# Altium PCB PCB2.pcbdoc (part 2 of 2)
Units mil, origin at the board's own origin, x right, y up, seen from the top; angles counter-clockwise.
Board outline 1968.5 x 1778.5 mil, 4 copper layers (Top Layer, Inner1, Inner2, Bottom Layer), stack 62.447 mil thick; 56 components, 57 nets, 242 pads, 74 vias.
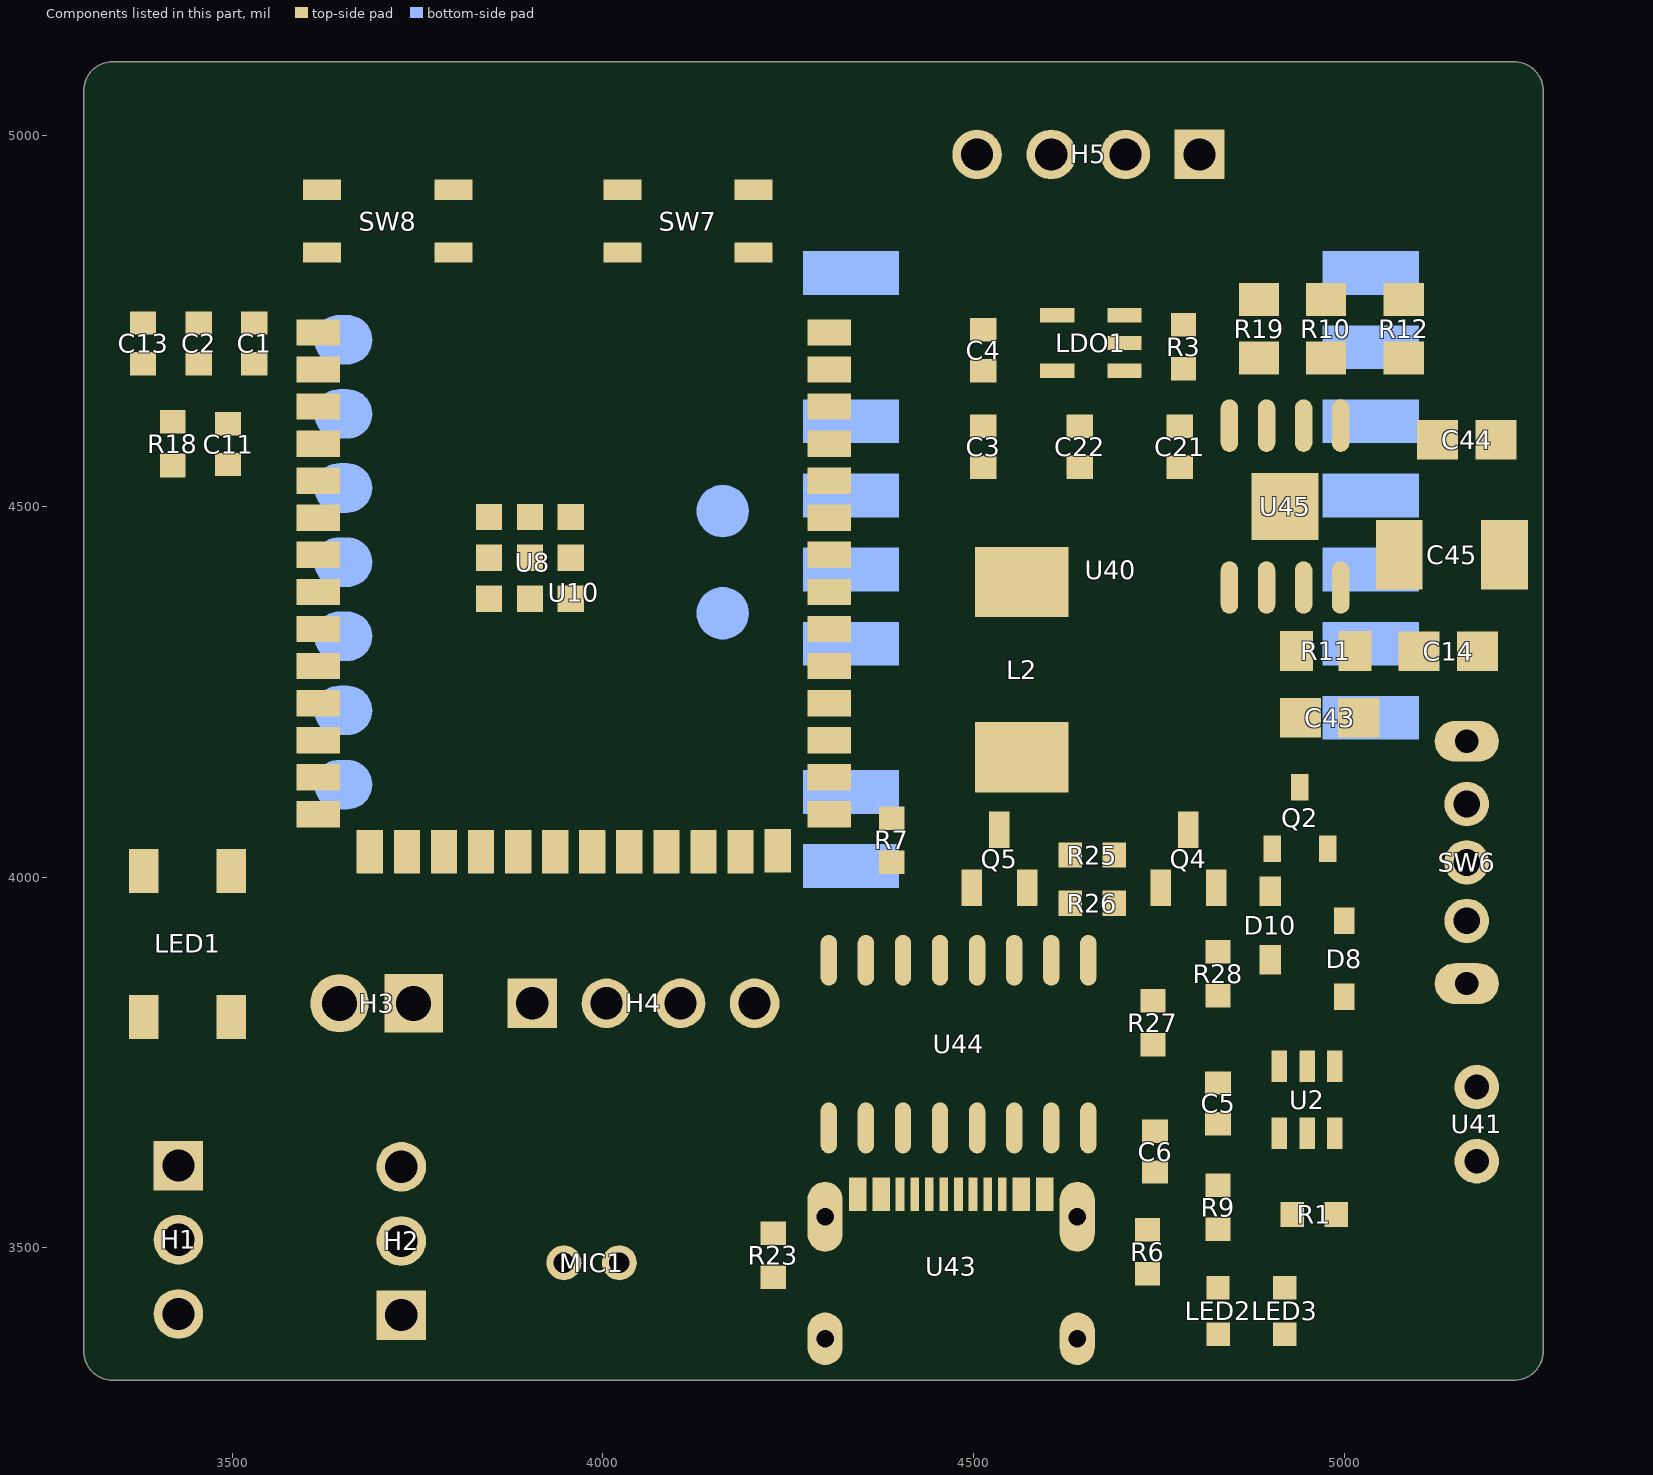
[diagram p4: the components of this part, seen from the top]

## Other copper (continued)
Bottom Layer:
  region net WS: 3552.49,4523.64 3548.25,4527.88 3548.67,4528.57 3548.8,4529.45 3548.71,4530.45 3548.48,4531.53 3547.89,4533.73 3547.68,4534.76 3547.62,4535.67 3560.28,4523.01 3559.37,4523.07 3558.34,4523.28 3556.14,4523.87 3555.06,4524.1 3554.06,4524.19 3553.19,4524.06
  region net $1N4036: 3641.61,3883.81 3647.61,3883.81 3647.84,3881.95 3648.47,3880.09 3649.48,3878.22 3650.8,3876.37 3652.4,3874.52 3654.21,3872.69 3658.31,3869.08 3667.06,3862.27 3670.93,3859.14 3673.96,3856.25 3615.27,3856.25 3618.29,3859.14 3622.16,3862.27 3630.91,3869.08 3635.01,3872.69 3636.83,3874.52 3638.42,3876.37 3639.75,3878.22 3640.75,3880.09 3641.39,3881.95
  region net SCK: 3682.24,3606.47 3682.24,3612.47 3683.8,3612.65 3685.36,3613.19 3686.94,3614.02 3688.51,3615.13 3690.09,3616.45 3691.66,3617.96 3694.74,3621.38 3700.58,3628.67 3703.24,3631.89 3705.67,3634.41 3705.67,3584.52 3703.24,3587.04 3700.58,3590.27 3694.74,3597.55 3691.66,3600.97 3690.09,3602.48 3688.51,3603.81 3686.94,3604.91 3685.36,3605.75 3683.8,3606.28
  region net DIN: 3694.61,4328 3694.61,4322 3693.58,4321.92 3692.54,4321.67 3691.53,4321.28 3690.58,4320.75 3689.73,4320.09 3689.02,4319.32 3688.47,4318.46 3688.13,4317.5 3688.13,4332.5 3688.47,4331.54 3689.02,4330.68 3689.73,4329.91 3690.58,4329.25 3691.53,4328.72 3692.54,4328.33 3693.58,4328.08
  region net BCLK: 3697.13,4228 3697.13,4222 3694.17,4221.84 3692.77,4221.6 3691.47,4221.21 3690.32,4220.63 3689.35,4219.84 3688.61,4218.81 3688.13,4217.5 3688.13,4232.5 3688.61,4231.19 3689.35,4230.16 3690.32,4229.37 3691.47,4228.79 3692.77,4228.4 3694.17,4228.16
  region net DIN: 3723.34,4375.52 3719.09,4371.27 3717.94,4372.24 3716.8,4372.84 3715.67,4373.15 3714.51,4373.23 3711.97,4373.08 3708.94,4373.01 3721.6,4385.67 3721.53,4382.65 3721.38,4380.11 3721.47,4378.94 3721.77,4377.81 3722.37,4376.68
  region net $1N4031: 3741.61,3878.37 3747.61,3878.37 ccw(c3758.86,3878.37) 3752.11,3869.37 3737.11,3869.37 ccw(c3730.36,3878.37)
  region net BCLK: 3758.34,4325.37 3754.09,4321.12 3752.94,4322.09 3751.8,4322.69 3750.67,4322.99 3749.51,4323.08 3746.97,4322.93 3743.94,4322.86 3756.6,4335.52 3756.53,4332.49 3756.38,4329.95 3756.47,4328.79 3756.77,4327.66 3757.37,4326.52
  region net WS: 3758.2,3543.93 3762.44,3539.69 3761.47,3538.46 3760.74,3536.97 3760.22,3535.27 3759.89,3533.37 3759.71,3531.32 3759.67,3529.14 3759.91,3524.55 3760.93,3515.27 3761.33,3511.1 3761.39,3507.61 3726.12,3542.88 3729.62,3542.82 3733.78,3542.42 3743.06,3541.39 3747.66,3541.16 3749.83,3541.2 3751.89,3541.37 3753.78,3541.71 3755.49,3542.23 3756.97,3542.96
  region net $1N4036: 4132.69,4460.93 4128.45,4465.17 4130.45,4467.38 4131.28,4468.55 4131.92,4469.74 4132.33,4470.96 4132.45,4472.2 4132.24,4473.45 4131.63,4474.71 4142.24,4464.11 4140.98,4464.71 4139.72,4464.93 4138.48,4464.8 4137.26,4464.39 4136.07,4463.75 4134.91,4462.92
  region net $1N4031: 4132.69,4323.13 4128.45,4327.37 4130.45,4329.59 4131.28,4330.75 4131.92,4331.94 4132.33,4333.16 4132.45,4334.4 4132.24,4335.66 4131.63,4336.92 4142.24,4326.31 4140.98,4326.92 4139.72,4327.13 4138.48,4327.01 4137.26,4326.6 4136.07,4325.96 4134.91,4325.13
  region net $1N5998: 3967.92,3504.95 3972.16,3500.71 3970.88,3499.3 3969.9,3497.98 3969.21,3496.74 3968.77,3495.54 3968.53,3494.37 3968.49,3493.22 3968.8,3490.89 3970.18,3485.65 3970.71,3482.45 3970.83,3480.65 3970.8,3478.69 3945.9,3503.59 3947.86,3503.62 3949.67,3503.5 3952.86,3502.97 3958.1,3501.59 3960.43,3501.27 3961.58,3501.32 3962.75,3501.55 3963.95,3502 3965.2,3502.69 3966.51,3503.66
  region net $1N5993: 4031.58,3511.21 4043.12,3514.26 4042.09,3513.1 4041.23,3511.86 4040.54,3510.55 4040,3509.18 4039.36,3506.29 4039.25,3503.26 4039.6,3500.16 4040.36,3497.07 4041.45,3494.04 4042.83,3491.16 4008.61,3499.45 4011.87,3501.42 4014.91,3502.82 4017.8,3503.86 4020.57,3504.76 4023.29,3505.73 4025.99,3506.98 4028.74,3508.74
  region net A3: 4854.09,4303.73 4858.34,4299.48 4857.37,4298.32 4856.77,4297.19 4856.47,4296.06 4856.38,4294.89 4856.53,4292.35 4856.6,4289.33 4843.94,4301.99 4846.97,4301.92 4849.51,4301.77 4850.67,4301.85 4851.8,4302.16 4852.94,4302.76
  region net A4: 4876.02,4203 4876.02,4197 4874.52,4196.87 4873.29,4196.49 4872.28,4195.9 4871.39,4195.14 4869.71,4193.23 4867.62,4191.05 4867.62,4208.95 4869.71,4206.77 4871.39,4204.86 4872.28,4204.1 4873.29,4203.51 4874.52,4203.13
  region net TX: 3932.55,4331.41 3938.55,4331.41 3938.68,4329.9 3939.06,4328.68 3939.65,4327.67 3940.41,4326.78 3942.31,4325.09 3944.5,4323.01 3926.6,4323.01 3928.78,4325.09 3930.69,4326.78 3931.45,4327.67 3932.04,4328.68 3932.41,4329.9
  region net RX: 3882.55,4286.41 3888.55,4286.41 3888.68,4284.9 3889.06,4283.68 3889.65,4282.67 3890.41,4281.78 3892.31,4280.09 3894.5,4278.01 3876.6,4278.01 3878.78,4280.09 3880.69,4281.78 3881.45,4282.67 3882.04,4283.68 3882.41,4284.9
  region net AS-RXD: 4001.61,3875.73 4007.61,3875.73 4007.8,3874.18 4008.33,3872.62 4009.17,3871.04 4010.27,3869.47 4011.6,3867.89 4013.11,3866.32 4016.53,3863.24 4023.81,3857.4 4027.04,3854.74 4029.55,3852.31 3979.67,3852.31 3982.19,3854.74 3985.41,3857.4 3992.7,3863.24 3996.12,3866.32 3997.63,3867.89 3998.95,3869.47 4000.06,3871.04 4000.89,3872.62 4001.43,3874.18
  region net CAT-TXD: 4721.31,5010.55 4736.44,5017.2 4734.78,5015.34 4733.48,5013.47 4732.51,5011.58 4731.85,5009.67 4731.46,5007.74 4731.32,5005.77 4731.4,5003.77 4731.66,5001.73 4732.62,4997.53 4733.99,4993.12 4735.51,4988.47 4736.97,4983.55 4692.52,5006.21 4694.41,5006.81 4696.31,5007.19 4698.24,5007.39 4700.17,5007.45 4704.02,5007.28 4707.82,5006.99 4711.51,5006.87 4713.29,5006.97 4715.02,5007.22 4716.7,5007.67 4718.31,5008.35 4719.85,5009.3
  region net RXD: 4472.61,4368.59 4466.61,4368.59 4466.48,4370.1 4466.1,4371.32 4465.51,4372.33 4464.75,4373.22 4462.85,4374.91 4460.66,4376.99 4478.56,4376.99 4476.38,4374.91 4474.47,4373.22 4473.71,4372.33 4473.12,4371.32 4472.75,4370.1
  region net RXD: 4727.96,3844.82 4732.2,3849.07 4733.36,3848.1 4734.49,3847.5 4735.63,3847.2 4736.79,3847.11 4739.33,3847.26 4742.35,3847.33 4729.7,3834.67 4729.76,3837.7 4729.92,3840.24 4729.83,3841.4 4729.53,3842.53 4728.93,3843.66
  region net SCK: 3372.61,4548.59 3366.61,4548.59 3366.48,4550.1 3366.1,4551.32 3365.51,4552.33 3364.75,4553.22 3362.85,4554.91 3360.66,4556.99 3378.56,4556.99 3376.38,4554.91 3374.47,4553.22 3373.71,4552.33 3373.12,4551.32 3372.75,4550.1
  region net AS-RXD: 4260.65,4502 4260.65,4508 ccw(c4260.65,4519.25) 4269.65,4512.5 4269.65,4497.5 ccw(c4260.65,4490.75)
  region net $1N5998: 4260.65,4102 4260.65,4108 ccw(c4260.65,4119.25) 4269.65,4112.5 4269.65,4097.5 ccw(c4260.65,4090.75)
  region net $1N5993: 4279.2,3980.74 4267.49,3977.51 ccw(c4254.37,3990.64) 4272.19,3985.47 4287.19,3985.47 ccw(c4292.45,3967.49)
  region net A4: 4961.43,4197 4961.43,4203 ccw(c4961.43,4214.25) 4970.43,4207.5 4970.43,4192.5 ccw(c4961.43,4185.75)
  region net A3: 4961.43,4302 4961.43,4308 ccw(c4961.43,4319.25) 4970.43,4312.5 4970.43,4297.5 ccw(c4961.43,4290.75)
  region net TX: 4961.43,4602 4961.43,4608 ccw(c4961.43,4619.25) 4970.43,4612.5 4970.43,4597.5 ccw(c4961.43,4590.75)
  region net RX: 4965.69,4735.06 4962.44,4746.81 ccw(c4975.68,4760.06) 4970.43,4742.07 4970.43,4727.07 ccw(c4952.45,4721.82)
  region net AS-TXD: 4313.37,3970.48 4313.37,3964.48 4311.86,3964.35 4310.64,3963.97 4309.62,3963.38 4308.74,3962.62 4307.05,3960.72 4304.96,3958.53 4304.96,3976.43 4307.05,3974.25 4308.74,3972.34 4309.62,3971.58 4310.64,3970.99 4311.86,3970.61
  region net CAT-TXD: 5075.02,4449.26 5086.76,4452.52 ccw(c5100.01,4439.27) 5082.03,4444.53 5067.03,4444.53 ccw(c5061.77,4462.51)
  region net CAT-RXD: 5075.02,4549.26 5086.76,4552.52 ccw(c5100.01,4539.27) 5082.03,4544.53 5067.03,4544.53 ccw(c5061.77,4562.51)
  region net TXD: 4508.34,4490.52 4504.09,4486.27 4502.94,4487.24 4501.8,4487.84 4500.67,4488.15 4499.51,4488.23 4496.97,4488.08 4493.94,4488.01 4506.6,4500.67 4506.53,4497.65 4506.38,4495.11 4506.47,4493.94 4506.77,4492.81 4507.37,4491.68
  region net TXD: 4826.61,3916.07 4832.61,3916.07 4832.75,3914.56 4833.12,3913.34 4833.71,3912.33 4834.47,3911.44 4836.38,3909.75 4838.56,3907.67 4820.66,3907.67 4822.85,3909.75 4824.75,3911.44 4825.51,3912.33 4826.1,3913.34 4826.48,3914.56
  region net AS-TXD: 4383.57,4577.48 4371.82,4580.74 ccw(c4358.58,4567.49) 4363.83,4585.47 4378.83,4585.47 ccw(c4396.81,4590.73)
  region net CAT-RXD: 4847.08,4978 4847.08,4972 ccw(c4847.08,4960.75) 4838.08,4967.5 4838.08,4982.5 ccw(c4847.08,4989.25)

## Silkscreen, mask and mechanical layers (free items; w line width, h text height)
Top Silkscreen Layer:
  drawing of 14 lines, arcs and shapes, not listed
  text "命令串口" at 4755,5080 h45 r180
  text "BOOT" at 4069.61,4960 h45
  text "RST" at 3654.61,4955 h45
  text "RXD TXD VCC GND" at 4875,4915 h45 r180
  text "SS8050" at 4735.83,4010.69 h30
  text "+   -" at 3624.61,3895 h45
  text "TXD RXD VCC GND" at 3850.39,3891.36 h45
  text "+  -" at 5210,3725 h45 r270
  text "天问烧录串口" at 3915,3715 h45
  text "SD" at 3499.61,3585 h45
  text "VCC" at 3489.61,3490 h45
  text "GND" at 3489.61,3385 h45
Bottom Silkscreen Layer:
  drawing of 14 lines, arcs and shapes, not listed
  text "+  -" at 5135,3720 h45 r90

## Text inside footprints (layer, text, board x,y; h text height)
MIC1: Top Silkscreen Layer "+" at 3929.61,3515 h39.37